# Altium PCB PCB1.PcbDoc
Units mil, origin at the board's own origin, x right, y up, seen from the top; angles counter-clockwise.
Board outline 3905 x 980 mil, 2 copper layers (Top Layer, Bottom Layer); 11 components, 30 nets, 78 pads, 3 vias.
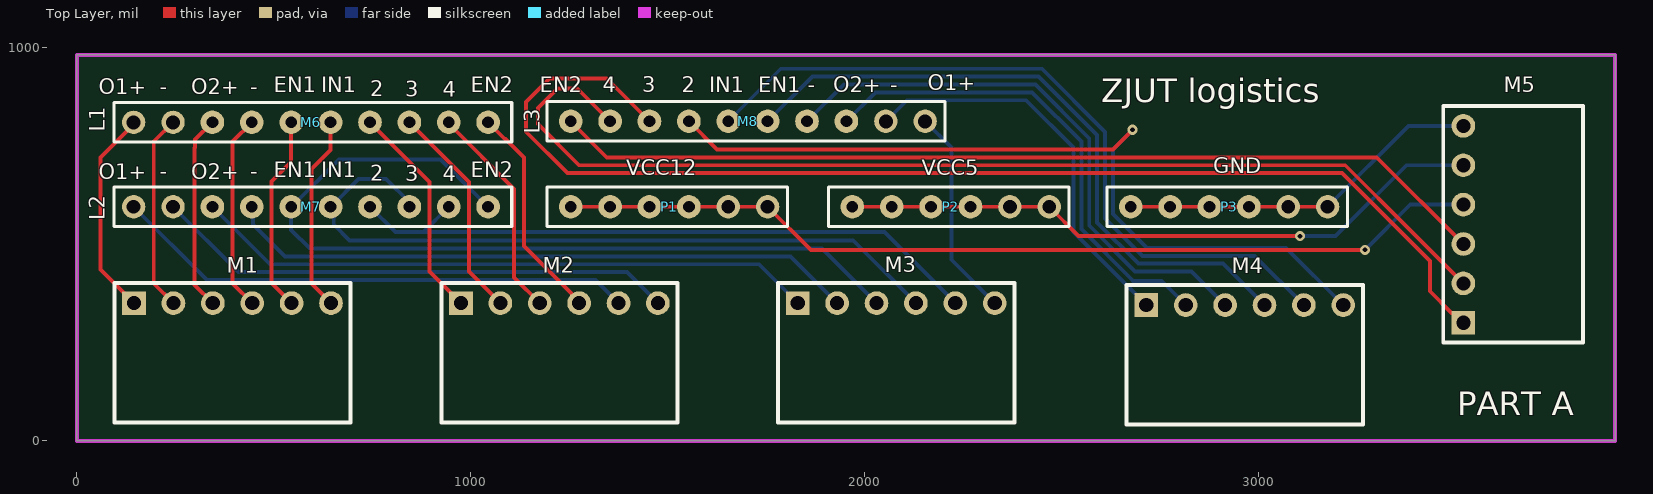
[diagram p0: Top Layer view]
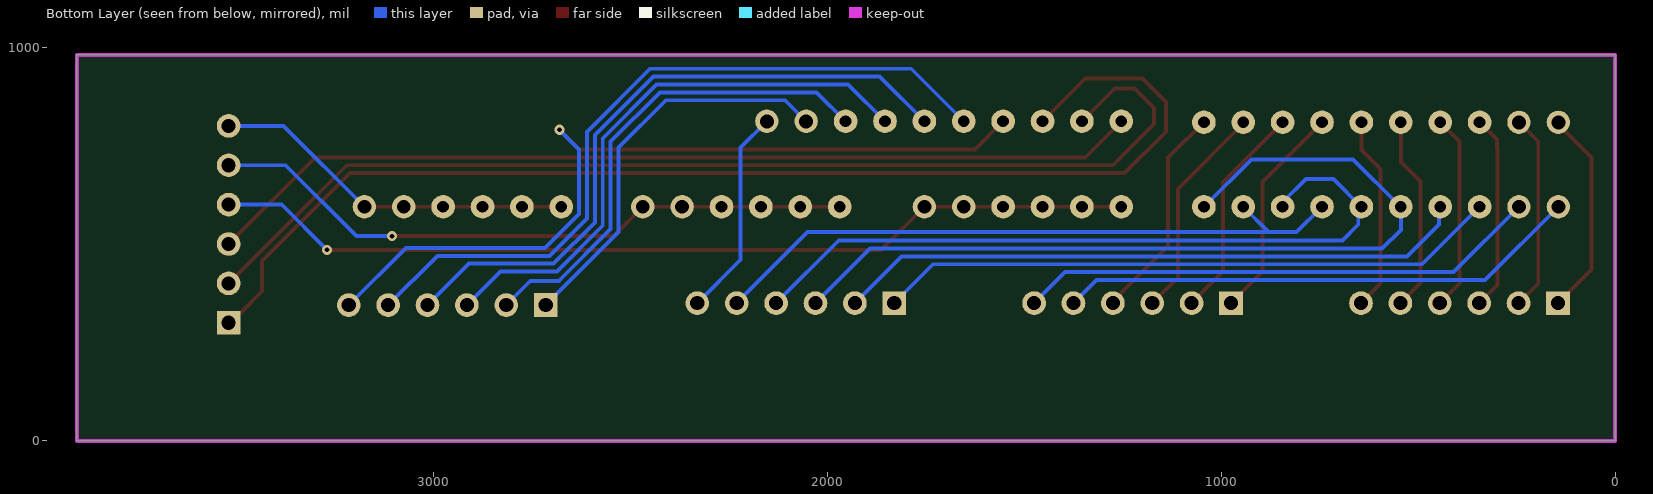
[diagram p1: Bottom Layer view, seen from below]

## Layer stack, top to bottom
Top Solder: solder mask 0.4, Solder Resist, Dk 3.5
Top Layer: signal copper 1.4
Dielectric 1: dielectric 12.6, FR-4, Dk 4.8
Bottom Layer: signal copper 1.4
Bottom Solder: solder mask 0.4, Solder Resist, Dk 3.5

## Board outline
0,0 0,980 3905,980 3905,0

## Design rules (kind name [scope] priority, off if disabled: settings)
Clearance [All] p1: gap=10 ignorepadtopadclearanceinfootprint=FALSE except(0: Arc-Hole Track-Hole SMDPad-Hole THPad-Hole Via-Hole Fill-Hole Poly-Hole Region-Hole Text-Hole)
PolygonConnect [All] p1: thpad.connectstyle=Direct thpad.reliefconductorwidth=10 thpad.reliefentries=4 thpad.polygonreliefangle="90 Angle" thpad.airgapwidth=10 smdpad.connectstyle=Relief smdpad.reliefconductorwidth=10 smdpad.reliefentries=4 smdpad.polygonreliefangle="90 Angle" smdpad.airgapwidth=10 via.connectstyle=Direct via.reliefconductorwidth=10 via.reliefentries=4 via.polygonreliefangle="90 Angle" via.airgapwidth=10
RoutingVias [All] p1: holewidth=28 width=50 viastyle="Through Hole" minholewidth=28 minwidth=50 maxholewidth=28 maxwidth=50
SolderMaskExpansion [All] p1: expansion=4 istentingtop=FALSE
Width [All] p1: maxlimit=40 minlimit=5 preferedwidth=10 minimp=50.000000 maximp=50.000000 favimp=50.000000
30 further rules are at their usual default settings.

## Components (designator, comment, footprint, x,y, rotation, side; value= is the part's Value field where it differs from the comment)
M1 "H2.54X6" Header6 -245,1301.85 r0 top
M2 "H2.54X6" Header6 585,1301.85 r0 top
M3 "H2.54X6" Header6 1440,1301.85 r0 top
M4 "H2.54X6" Header6 2325,1296.85 r0 top
M5 "H2.54X6" Header6 2568.15,-90 r90 top
M6 "L289N" HDR1X10 143.94,808.99 r0 top
M7 "L289N" HDR1X10 143.94,594.61 r0 top
M8 "L289N" HDR1X10 2153.52,811.61 r180 top
P1 "HEADER_6" HDR1X6 1753.52,594.61 r180 top
P2 "HEADER_6" HDR1X6 2468.56,594.61 r180 top
P3 "HEADER_6" HDR1X6 3175.28,594.61 r180 top

## Footprints (in the part's own frame and the unit in brackets; to place one, negate y for a bottom-side part, rotate by r counter-clockwise, add the part's x,y. Pads: shape width x height; smd on the part's side, far side on the other; paste and mask are expansions set on the pad)
HDR1X6 [mil]
  round 59.06 hole 35.43: 1(0,0) 2(100,0)
  round 60 hole 30: 3(200,0) 4(300,0) 5(400,0) 6(500,0)
  silkscreen extent -50,-50 560,50
HDR1X10 [mil]
  round 59.06 hole 35.43: 1(0,0) 2(100,0)
  round 60 hole 30: 3(200,0) 4(300,0) 5(400,0) 6(500,0) 7(600,0) 8(700,0) 9(800,0) 10(900,0)
  silkscreen extent -50,-50 960,50
Header6 [mil]
  rect 60x60 hole 36: 1(390,-951.85)
  round 60 hole 36: 2(490,-951.85) 3(590,-951.85) 4(690,-951.85) 5(790,-951.85) 6(890,-951.85)
  silkscreen extent 340,-1255 940,-901

## Via types
v1: diameter 25.59, hole 11.81, Top Layer to Bottom Layer, 3 vias

## Nets (pads, with @x,y where several pads share a name; then routed paths per layer and width w, separated by ;. In a path a pad name is that pad's centre, name@x,y a point inside that pad or via, vN(x,y) a via of type N, cw(c..) or ccw(c..) an arc to the next point about the centre after c; other vN are vias at no path point)
GND: M5.6 P3.1 P3.2 P3.3 P3.4 P3.5 P3.6 | length 929.8
  Top Layer w10: P3.6 P3.5 P3.4 P3.3 P3.2 P3.1
  Bottom Layer w10: P3.1 3380.68,800 M5.6
M1_EN1: M1.5 M6.5 | length 500.7
  Top Layer w10: M6.5 543.94,708.22 494.15,658.43 494.15,400.85 M1.5
M1_EN2: M2.4 M6.10 | length 555.9
  Top Layer w10: M6.10 1086.15,766.78 1088.22,766.78 1135,720 1135,495 1275,355 M2.4
M1_IN1: M1.6 M6.6 | length 500
  Top Layer w10: M6.6 643.94,738.94 595,690 595,400 M1.6
M1_IN2: M2.1 M6.7 | length 554.7
  Top Layer w10: M6.7 895,657.93 895,430 M2.1
M1_IN3: M2.2 M6.8 | length 554.7
  Top Layer w10: M6.8 995,657.93 995,430 M2.2
M1_IN4: M2.3 M6.9 | length 554.7
  Top Layer w10: M6.9 943.94,806.06 1110,640 1110,415 M2.3
M1_OUT1+: M1.1 M6.1 | length 529
  Top Layer w10: M6.1 143.94,803.94 60,720 60,435 M1.1
M1_OUT1-: M1.2 M6.2 | length 500
  Top Layer w10: M6.2 195,760.06 195,400 M1.2
M1_OUT2+: M1.3 M6.3 | length 496.7
  Top Layer w10: M6.3 300,765.06 300,745 298.94,743.94 298.94,396.06 M1.3
M1_OUT2-: M1.4 M6.4 | length 500
  Top Layer w10: M6.4 395,760.06 395,400 M1.4
M2_EN1: M3.3 M7.5 M7.10 | length 2221.4
  Bottom Layer w10: M7.10 923.54,715 665,715 544.61,594.61 M7.5 543.94,536.06 591.36,488.64 1891.36,488.64 M3.3
M2_IN1: M3.4 M7.6 M7.8 | length 1874.1
  Bottom Layer w10: M7.8 843.94,606.06 785,665 715,665 644.61,594.61 M7.6 651.91,586.63 651.91,549.61 692.45,509.07 1970.93,509.07 M3.4
M2_IN2: M3.5 M7.7 M7.9 | length 1678.7
  Bottom Layer w10: M7.7 808.54,530 879.33,530 ; M7.9 879.33,530 ; M3.5 2050,530 879.33,530
M2_OUT1+: M2.5 M7.1 | length 1332.4
  Bottom Layer w10: M7.1 329.91,408.64 1316.36,408.64 M2.5
M2_OUT1-: M2.6 M7.2 | length 1332.4
  Bottom Layer w10: M7.2 409.91,428.64 1396.36,428.64 M2.6
M2_OUT2+: M3.1 M7.3 | length 1587.4
  Bottom Layer w10: M7.3 489.91,448.64 1731.36,448.64 M3.1
M2_OUT2-: M3.2 M7.4 | length 1612
  Bottom Layer w10: M7.4 446.91,591.63 446.91,549.61 527.88,468.64 1811.36,468.64 M3.2
M3_EN1: M4.4 M8.5 | length 1678.6
  Bottom Layer w10: M8.5 1866.92,925 2441.57,925 2590,776.57 2590,554.85 2694.85,450 2910,450 M4.4
M3_EN2: M5.3 M8.10 | length 2395.5
  Top Layer w10: M8.10 1345.13,720 3300,720 M5.3
M3_IN1: M4.5 M8.6 | length 1894
  Bottom Layer w10: M8.6 1786.92,945 2449.85,945 2610,784.85 2610,565 2705,470 2990,470 M4.5
M3_IN2: M4.6 M8.7 | length 2092.1
  Top Layer w10: M8.7 1625.13,740 2630,740 v1(2680,790)
  Bottom Layer w10: v1(2680,790) 2630,740 2630,576.25 2716.25,490 3070,490 M4.6
M3_IN3: M5.1 M8.8 | length 3084.1
  Top Layer w10: M8.8 1345.13,920 1200,920 1140,860 1140,785 1245,680 3211.72,680 3435,456.72 3435,380 3490,325 3495,325 M5.1
M3_IN4: M5.2 M8.9 | length 2796.5
  Top Layer w10: M8.9 1270.13,895 1220,895 1170,845 1170,805 1275,700 3220,700 3384.36,535.64 M5.2
M3_OUT1+: M3.6 M8.1 | length 534.7
  Bottom Layer w10: M8.1 2220,745.13 2220,460 M3.6
M3_OUT1-: M4.1 M8.2 | length 1024.9
  Bottom Layer w10: M8.2 2106.92,865 2410,865 2530,745 2530,530 M4.1
M3_OUT2+: M4.2 M8.3 | length 1245.4
  Bottom Layer w10: M8.3 2026.92,885 2425,885 2550,760 2550,538.28 2681.64,406.64 2753.36,406.64 M4.2
M3_OUT2-: M4.3 M8.4 | length 1462
  Bottom Layer w10: M8.4 1946.92,905 2433.28,905 2570,768.28 2570,546.57 2686.57,430 2830,430 M4.3
VCC5: M5.5 P2.1 P2.2 P2.3 P2.4 P2.5 P2.6 | length 1656.9
  Top Layer w10: P2.6 P2.5 P2.4 P2.3 P2.2 P2.1 2543.17,520 v1(3105,520)
  Bottom Layer w10: v1(3105,520) 3195,520 3375,700 M5.5
VCC12: M5.4 P1.1 P1.2 P1.3 P1.4 P1.5 P1.6 | length 2359.5
  Top Layer w10: P1.6 P1.5 P1.4 P1.3 P1.2 P1.1 1863.13,485 v1(3270,485)
  Bottom Layer w10: v1(3270,485) 3385,600 M5.4

## Polygon pours and split planes (outlines as drawn)
no net on Top Overlay "NONET_L-01_P-001" (solid): 0,980

## Keep-outs
Keep-Out Layer:
  the board outline again, w10

## Silkscreen, mask and mechanical layers (free items; w line width, h text height)
Top Overlay:
  text "O1+" at 2160,890 h39.37
  text "EN1" at 500,885 h39.37
  text "IN1" at 620,885 h39.37
  text "EN2" at 1000,885 h39.37
  text "EN2" at 1175,885 h39.37
  text "4" at 1335,885 h39.37
  text "3" at 1435,885 h39.37
  text "2" at 1535,885 h39.37
  text "IN1" at 1605,885 h39.37
  text "EN1" at 1730,885 h39.37
  text "-" at 1855,885.32 h39.37
  text "O2+" at 1920,885 h39.37
  text "-" at 2065,885.32 h39.37
  text "O1+" at 55,880 h39.37
  text "-" at 210,880.32 h39.37
  text "O2+" at 290,880 h39.37
  text "-" at 440,880.32 h39.37
  text "2" at 745,875 h39.37
  text "3" at 833.33,874.31 h39.37
  text "4" at 928.33,874.31 h39.37
  text "ZJUT logistics" at 2600,860 h60
  text "L1" at 70,785 h39.37 r90
  text "L3" at 1175,780 h39.37 r90
  text "GND" at 2885,680 h39.37
  text "VCC12" at 1395,675 h39.37
  text "VCC5" at 2145,675 h39.37
  text "EN1" at 500,670 h39.37
  text "IN1" at 620,670 h39.37
  text "EN2" at 1000,670 h39.37
  text "O1+" at 55,665 h39.37
  text "-" at 210,665.32 h39.37
  text "O2+" at 290,665 h39.37
  text "-" at 440,665.32 h39.37
  text "2" at 745,660 h39.37
  text "3" at 833.33,659.31 h39.37
  text "4" at 928.33,659.31 h39.37
  text "L2" at 70,560 h39.37 r90
  text "PART A" at 3505,65 h60